# Altium PCB 锐米LoRa终端评估DEMO板_硬件PCB图.PcbDoc
Units mil, origin at the board's own origin, x right, y up, seen from the top; angles counter-clockwise.
Board outline 6000 x 4000 mil, 2 copper layers (Top Layer, Bottom Layer); 48 components, 44 nets, 189 pads, 93 vias.
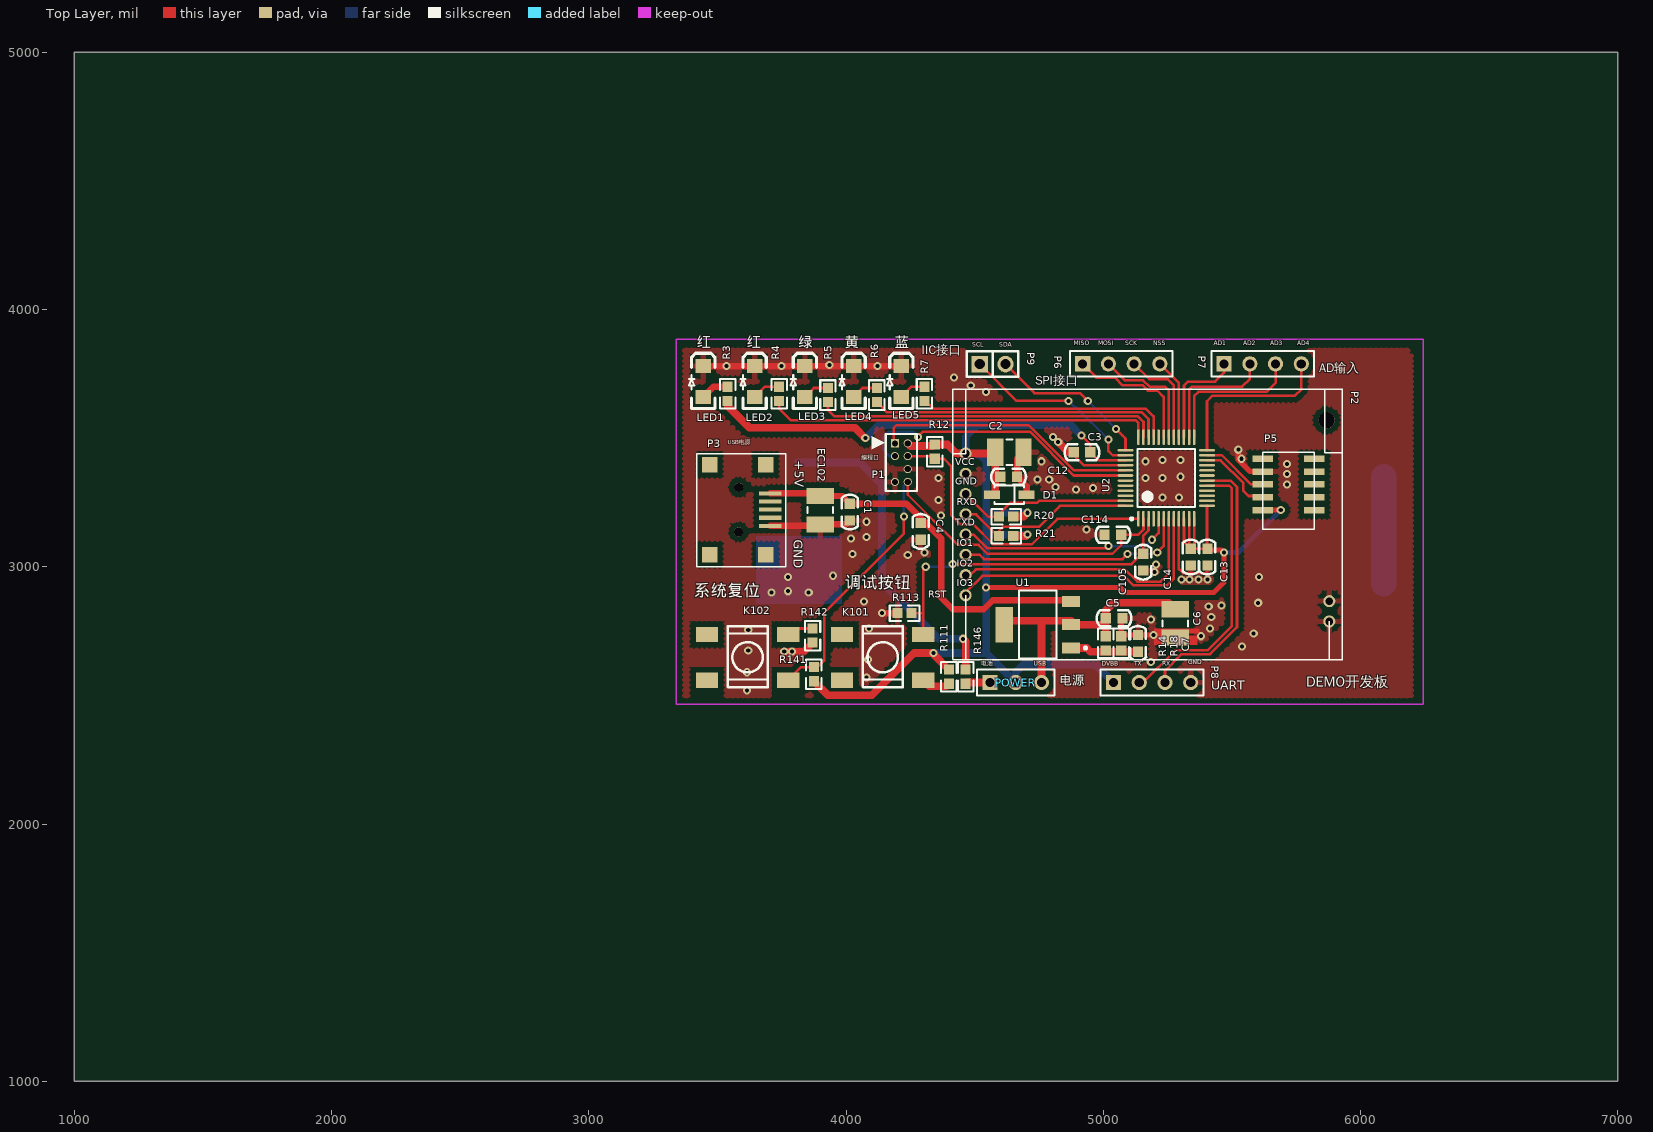
[diagram p0: Top Layer view]
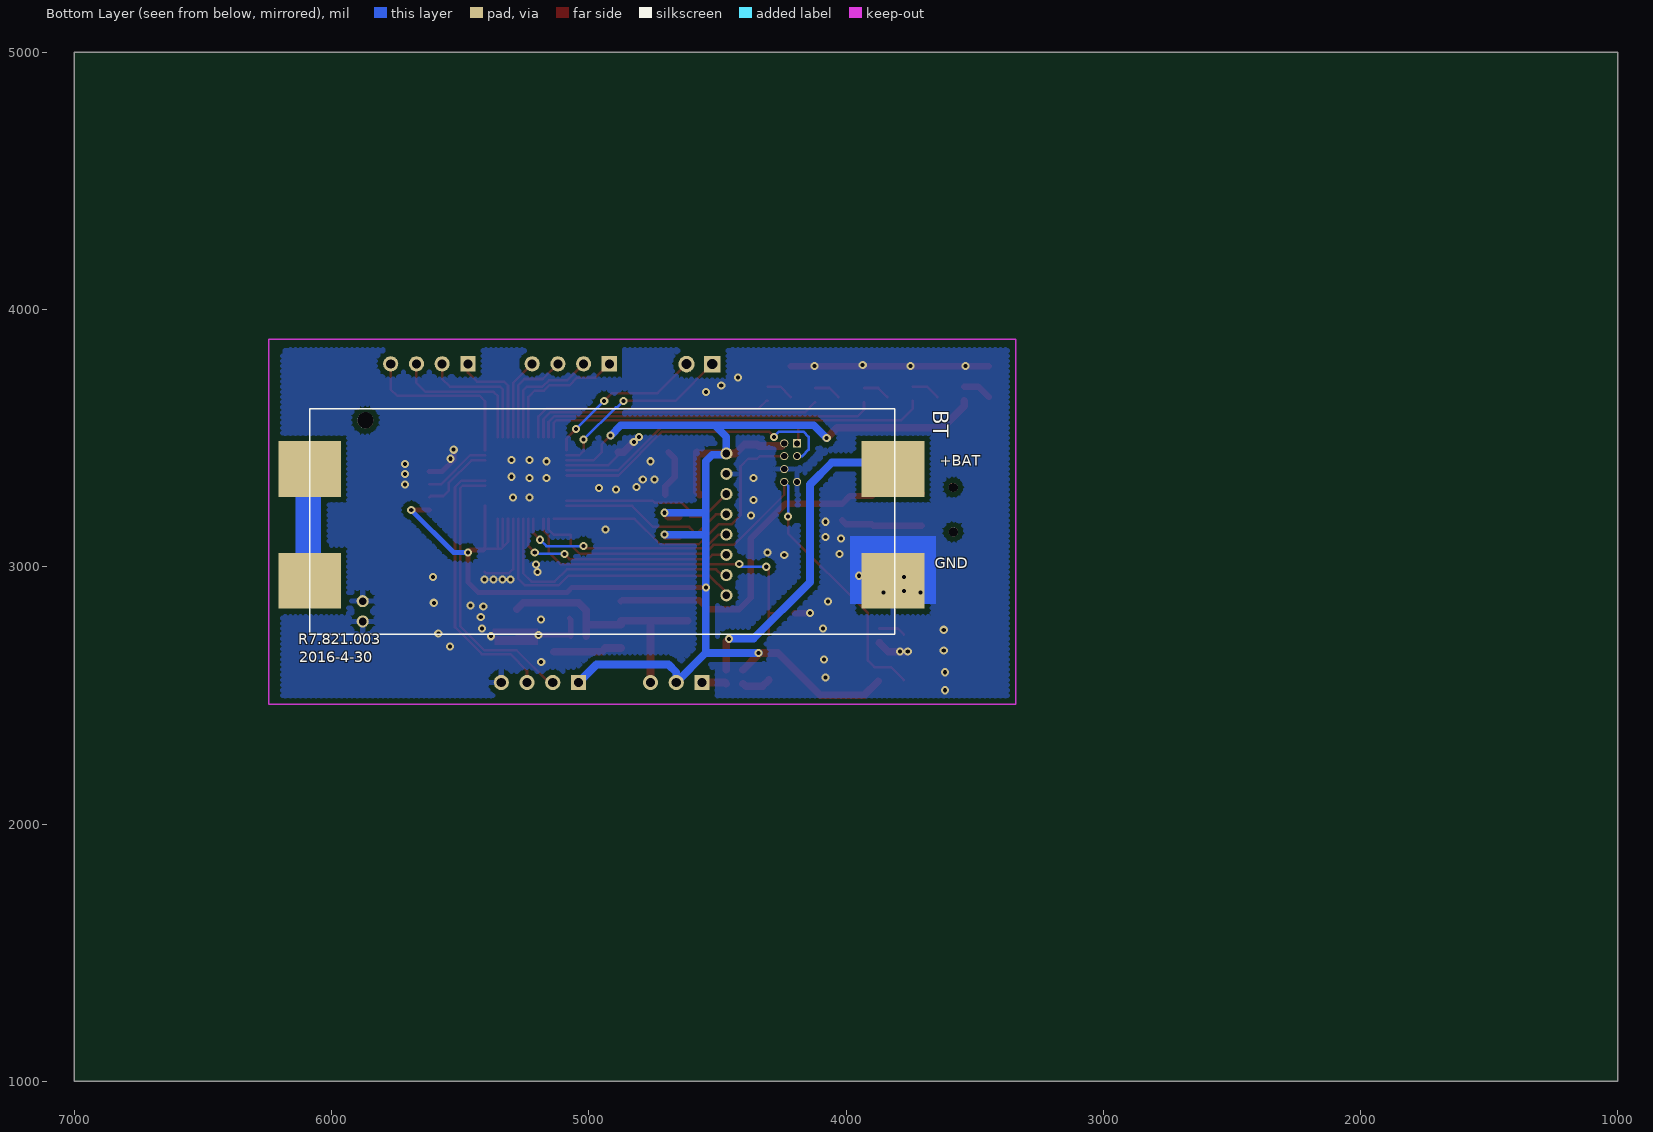
[diagram p1: Bottom Layer view, seen from below]

## Layer stack, top to bottom
Top Layer: signal copper 1.4
Dielectric: dielectric 12.6, FR-4, Dk 4.8
Bottom Layer: signal copper 1.4

## Board outline
1000,1000 7000,1000 7000,5000 1000,5000

## Design rules (kind name [scope] priority, off if disabled: settings)
Clearance Clearance_1 [All vs InPolygon] p1: gap=20
Clearance [All] p2: gap=5
ComponentClearance [All] p1 off: gap=10 collisioncheckmode=3 verticalgap=10 showdistances=FALSE
MinimumSolderMaskSliver [All] p1 off: minsoldermaskwidth=10
PolygonConnect PolygonConnect_1 [All vs ViaDiameter] p1: connectstyle=Direct reliefconductorwidth=10 reliefentries=4 polygonreliefangle="90 Angle"
PolygonConnect [All] p2: connectstyle=Relief reliefconductorwidth=20 reliefentries=4 polygonreliefangle="90 Angle"
RoutingVias [All] p1: holewidth=28 width=50 viastyle="Through Hole" minholewidth=10 minwidth=10 maxholewidth=28 maxwidth=50
SilkToSilkClearance [All] p1 off: silktosilkclearance=10
SilkscreenOverComponentPads [All] p1 off: minsilkscreentomaskgap=10
SolderMaskExpansion [All] p1: expansion=4
Width [All] p1: maxlimit=100 minlimit=10 preferedwidth=10
24 further rules are at their usual default settings.

## Components (designator, comment, footprint, x,y, rotation, side; value= is the part's Value field where it differs from the comment)
BT "Header 4" BT-1 6085,3400 r180 bottom locked
C1 "0.01u" 0603C 4015,3180 r90 top
C2 "Cap Pol1" 3225[1210] 4635,3445 r0 top
C3 "0.01u" 0603C 4950,3445 r180 top
C4 "0.01uF" 0603c 4290,3105 r90 top
C5 "0.01uF" 0603C 5075,2800 r180 top
C6 "22uF" 3225[1210] 5280,2780 r270 top
C7 "1000pF" 0603C 5135,2735 r270 top
C12 "0.01uF" 0603C 4665,3350 r180 top
C13 "0.01u" 0603C 5405,3005 r90 top
C14 "1u" 0603C 5340,3005 r90 top
C105 "0.01u" 0603C 5155,2985 r90 top
C114 "0.01u" 0603C 5005,3125 r0 top
D1 "ESD" SOD123/X.85 4635,3280 r180 top
EC102 "220uF/10V" 3225[1210] 3900,3220 r270 top
K101 "" KEYSMT 3985,2560 r180 top
K102 "" KEYSMT 3460,2560 r180 top
LED1 "HSMS-C280红" LED-SOP 3445,3660 r270 top
LED2 "HSMS-C280红" LED-SOP 3645,3660 r270 top
LED3 "HSMS-C280绿" LED-SOP 3840,3660 r270 top
LED4 "HSMS-C280黄" LED-SOP 4030,3660 r270 top
LED5 "HSMS-C280蓝" LED-SOP 4215,3660 r270 top
P1 "DEBUG" HDR-2X7-F-1.27MM_8 4140,3380 r0 top
P2 "LoRa_Module" LIRDA 4465,3440 r270 top locked
P3 "Header 5" USB-MINI 3705,3285 r270 top
P5 "Header 4" SHT10 5620,3420 r0 top
P6 "Header 4" HDR1X4 4920,3788.94 r0 top
P7 "Header 4" HDR1X4 5470,3788.94 r0 top
P8 "Header 4" HDR1X4 5040,2550 r0 top
P9 "Header 2H" SIP2 4520,3787.87 r0 top
POWER "Header 3H" SIP3 4560,2550 r180 top
R3 "Resistor" 0603R 3540,3645 r90 top
R4 "Resistor" 0603R 3740,3645 r90 top
R5 "Resistor" 0603R 3930,3640 r90 top
R6 "Resistor" 0603R 4120,3640 r90 top
R7 "Resistor" 0603R 4305,3645 r90 top
R12 "10k" 0603R 4345,3420 r90 top
R14 "2.2k" 0603R 5010,2730 r270 top
R18 "3.6k" 0603R 5070,2675 r90 top
R20 "Resistor" 0603R 4650,3195 r180 top
R21 "Resistor" 0603R 4650,3120 r180 top
R111 "22k" 0603R 4400,2600 r270 top
R113 "1M" 0603R 4255,2820 r180 top
R141 "22k" 0603R 3875,2555 r90 top
R142 "1K" 0603R 3870,2705 r90 top
R146 "51" 0603R 4465,2545 r90 top
U1 "LM317MBSTT3" 318E-04 4745,2775 r90 top
U2 "STM8L151C8T6D" LQFP48_L 5245,3345 r90 top

## Footprints (in the part's own frame and the unit in brackets; to place one, negate y for a bottom-side part, rotate by r counter-clockwise, add the part's x,y. Pads: shape width x height; smd on the part's side, far side on the other; paste and mask are expansions set on the pad)
318E-04 [mm] "SOT-223/SC-73; 4 Leads; Body 6.7 x 7.3 mm, inc. leads (LxW max)"
  rect 1.1x1.75 smd: 1(-2.3,-3.3) 2(0,-3.3) 3(2.3,-3.3)
  rect 3.5x1.75 smd: 4(0,3.3)
  silkscreen extent -3.35,-4.85 3.35,1.85
0603C [mil]
  rect 40x40 smd: 1(65.09,-0.09) 2(0.09,-0.09)
  silkscreen extent -35,-31 100,31
0603c [mil]
  rect 40x40 smd: 1(65.09,-0.09) 2(0.09,-0.09)
  silkscreen extent -35,-31 100,31
0603R [mm]
  rect 1x1 smd: 1(0,0) 2(1.397,0)
  silkscreen extent -0.76,-0.76 2.16,0.76
3225[1210] [mm] "Chip Resistor; Body 3.2 x 2.5 mm (LxW typ)"
  rect 1.6x2.7 smd: 1(-1.4,0) 2(1.4,0)
  silkscreen extent -0.3,-1.25 0.3,1.25
BT-1 [mm]
  rect 6.2x5.5 smd: 1(57.6,-0.5) 2(0,-0.5) 3(0,-11.55) 4(57.6,-11.55)
  round 1.6 hole 1.6: ""(5.5,4.3)
  silkscreen extent 0,-16.84 57.78,5.46
HDR1X4 [mm] "Connector; Header; 4 Position"
  rect 1.5x1.5 hole 0.9: 1(0,0)
  round 1.5 hole 0.9: 2(2.54,0) 3(5.08,0) 4(7.62,0)
  silkscreen extent -1.27,-1.27 8.89,1.27
HDR-2X7-F-1.27MM_8 [mm] "Connector; Header; 10x2 Position"
  rect 0.8x0.8 hole 0.6: 1(1.27,2.54)
  round 0.8 hole 0.6: 2(2.54,2.54) 3(1.27,1.27) 4(2.54,1.27) 6(2.54,0) 7(1.27,-1.27) 8(2.54,-1.27)
  silkscreen extent -1.02,-2.17 3.44,3.44
KEYSMT [mil]
  rect 86.61x60 smd: 1(-315.4,0.45) 2(-315.4,-176.72) 3(0.35,0.45) 4(0.35,-176.72)
  silkscreen extent -236,-208 -81,28
LED-SOP [mil]
  rect 55x60 smd: 1(0,0) 2(-120,0)
  silkscreen extent -170,-55 45,45
LIRDA [mm]
  round 1.2 hole 0.762: 1(0,0) 2(2,0) 3(4,0) 4(6,0) 5(8,0) 6(10,0) 7(12,0) 8(14,0) 9(16.57,35.91) 10(14.57,35.91)
  silkscreen extent -6.35,-1.27 20.35,37.23
LQFP48_L [mm] "Thin QFP, 48-Leads, Body 7x7mm, Pitch 0.5mm, IPC High Density"
  oval 1.55x0.25 smd: 1(-4.025,2.75) 2(-4.025,2.25) 3(-4.025,1.75) 4(-4.025,1.25) 5(-4.025,0.75) 6(-4.025,0.25) 7(-4.025,-0.25) 8(-4.025,-0.75) 9(-4.025,-1.25) 10(-4.025,-1.75) 11(-4.025,-2.25) 12(-4.025,-2.75) 25(4.025,-2.75) 26(4.025,-2.25) 27(4.025,-1.75) 28(4.025,-1.25) 29(4.025,-0.75) 30(4.025,-0.25) 31(4.025,0.25) 32(4.025,0.75) 33(4.025,1.25) 34(4.025,1.75) 35(4.025,2.25) 36(4.025,2.75)
  oval 0.25x1.55 smd: 13(-2.75,-4.025) 14(-2.25,-4.025) 15(-1.75,-4.025) 16(-1.25,-4.025) 17(-0.75,-4.025) 18(-0.25,-4.025) 19(0.25,-4.025) 20(0.75,-4.025) 21(1.25,-4.025) 22(1.75,-4.025) 23(2.25,-4.025) 24(2.75,-4.025) 37(2.75,4.025) 38(2.25,4.025) 39(1.75,4.025) 40(1.25,4.025) 41(0.75,4.025) 42(0.25,4.025) 43(-0.25,4.025) 44(-0.75,4.025) 45(-1.25,4.025) 46(-1.75,4.025) 47(-2.25,4.025) 48(-2.75,4.025)
  silkscreen extent -4.15,-2.85 2.85,3.55, body extent -3.5,-3.5 3.5,3.5, height 1.6
SHT10 [mm]
  rect 2x0.65 smd: 0(0,0) 1(0,-1.27) 2(0,-2.54) 3(0,-3.81) 4(0,-5.08) 5(5.08,-5.08) 6(5.08,-3.81) 7(5.08,-2.54) 8(5.08,-1.27) 9(5.08,0)
  round 0.7 on Top Overlay: 1(-0.508,0.889)
  silkscreen extent 0,-6.97 5.1,0.64
SIP2 [mil]
  rect 64x64 hole 40: 1(0,0)
  round 64 hole 40: 2(100,0)
  silkscreen extent -50,-50 150,50
SIP3 [mm]
  rect 1.5x1.5 hole 0.9: 1(0,0)
  round 1.5 hole 0.9: 2(-2.54,0) 3(-5.08,0)
  silkscreen extent -6.35,-1.27 1.27,1.27
SOD123/X.85 [mm] "SOD-123; 2 Leads; Body 2.7 x 1.6 mm, (LxW)"
  rect 1.6x0.85 smd: 1(-1.7,0) 2(1.7,0)
  silkscreen extent -1.45,-0.9 1.45,0.9
USB-MINI [mm]
  round 0.9 hole 0.9: 0(-0.6,-3.1) 0(3.8,-3.1)
  rect 0.4x2.2 smd: 1(0,0) 2(0.8,0) 3(1.6,0) 4(2.4,0) 5(3.2,0)
  rect 1.524x1.524 smd: ""(-2.85,-0.45) ""(-2.85,-5.95) ""(6.05,-0.45) ""(6.05,-5.95)
  silkscreen extent -3.94,-7.24 7.24,1.52

## Part data
BT P5: "Header, 4-P"
C1: library part CAP, "Capacitor"
C2: "Polarized Capacitor (Radial)"
C3 C13 C14: library part "0603_50V_15pF±5% NPO", "电容"
C4 C5 C6 C7 C12 C105 C114: library part ProE.tmp_22p_13
D1: library part Diode, "Default Diode"
EC102: library part "Cap Pol1", "Polarized Capacitor (Radial)"
K101 K102: library part SW-
LED1 LED2 LED3 LED4 LED5: library part HSMS-C280, "Miniature Chip LED, R"
P1: library part "Header 4X2", "Header, 4-Pin, Dual row"
P2: library part "Header 10", "Header, 10-Pin"
P3: "Header, 5-P"
P6 P7 P8: "Header, 4-Pin"
P9: "Header, 2-Pin, Right Ang"
POWER: "Header, 3-Pin, Right Ang"
R3 R4 R5 R6 R7 R20 R21: "Resistor SMD - IEC symbol versi"
R12: library part RES
R14 R18: library part 0603_20kΩ±1%100pp
R111 R113 R141 R142 R146: library part ProE.tmp_10k_
U1: "Three-Terminal Adjustable Output Positive Voltage Regulator"
U2: library part Component_1

## Via types
v1: diameter 31.5, hole 15.75, Top Layer to Bottom Layer, tented both sides, 93 vias

## Nets (pads, with @x,y where several pads share a name; then routed paths per layer and width w, separated by ;. In a path a pad name is that pad's centre, name@x,y a point inside that pad or via, vN(x,y) a via of type N, cw(c..) or ccw(c..) an arc to the next point about the centre after c; other vN are vias at no path point)
+3.3V: C5.1 C6.1 POWER.3 R14.1 U1.2 U1.4 | length 1029.7
  Top Layer w30: U1.4@4615.08,2790 4755,2790 ; POWER.3 4760,2785 4755,2790 ; U1.2 5009.91,2775 ; U1.2@4874.92,2790 4755,2790 ; R14.1 5009.91,2730.09 5009.91,2775 ; C6.1 5255.12,2860 5040,2860 5009.91,2829.91 C5.1 5009.91,2775
AD1: P7.1 U2.27 | length 411.6
  Top Layer w10: U2.27 5313.9,3703.9 5330,3720 5435,3720 5470,3755 P7.1
AD2: P7.2 U2.26 | length 497.6
  Top Layer w10: U2.26 5333.58,3688.58 5345,3700 5540,3700 5570,3730 P7.2
AD3: P7.3 U2.25 | length 571.9
  Top Layer w10: U2.25 5353.27,3663.27 5370,3680 5635,3680 5670,3715 P7.3
AD4: P7.4 U2.24 | length 674.9
  Top Layer w10: U2.24 5403.46,3643.46 5425,3665 5745,3665 5770,3690 P7.4
DATA: P5.2 U2.23 | length 263.6
  Top Layer w10: U2.23 5461.42,3433.58 5575,3320 P5.2
DISPLAY: C105.1 K101.2 R113.1 U2.3 | length 1325.7
  Top Layer w10: R113.1 4300.4,2820 ; K101.2 4300.4,2820 ; v1(4310,3000) 4300.4,2990.4 4300.4,2820 ; v1(4415,3010) 5110,3010 C105.1@5155,3055 ; C105.1 5155,3050.18 C105.1@5155,3055 ; U2.3 5176.1,3141.1 5155,3120 C105.1@5155,3055
  Bottom Layer w10: v1(4310,3000) 4405,3000 v1(4415,3010)
DVBB: C2.1 C3.2 C12.1 C13.1 C14.1 D1.2 P1.2 P2.1 P5.4 P8.1 POWER.2 R3.1 R12.2 R20.1 R21.1 R111.1 R141.1 U2.10 U2.11 U2.12 U2.13 U2.39 | length 7205.9
  Top Layer w10: v1(4915,3510) 4949.91,3475.09 C3.2 4981.1,3413.9 U2.39 ; U2.10 5313.9,3096.28 C14.1@5333.58,3076.59 ; U2.11 C14.1@5333.58,3076.59 ; U2.12 C14.1@5353.27,3070.09 ; U2.13 5403.46,3071.71 C13.1 C14.1@5353.27,3070.09 ; C14.1@5333.58,3076.59 C14.1 C14.1@5353.27,3070.09
  Top Layer w20: v1(4545,2920) 5065,2920 5085,2900 5430,2900 5470,2940 v1(5470,3055) 5460,3065 5410.18,3065 C13.1 ; P5.4 v1(5690,3220)
  Top Layer w30: R3.1 3540,3625 3625,3540 4035,3540 v1(4075,3500) ; R141.1 3930,2500 4100,2500 4265,2665 v1(4340,2665) 4340,2660 R111.1 ; P1.2 4250.75,3469.25 4339.25,3469.25 R12.2 4395,3475 4430,3440 P2.1 4574.88,3440 C2.1 4579.88,3291.81 D1.2 ; R21.1 4700,3120 v1(4705,3125) ; R20.1 4690,3195 v1(4705,3210)
  Bottom Layer w20: v1(5470,3055) 5525,3055 v1(5690,3220)
  Bottom Layer w30: v1(4075,3500) 4125,3550 4510,3550 ; v1(4340,2665) 4545,2665 ; v1(4705,3125) 4545,3125 ; v1(4705,3210) 4545,3210 ; v1(4915,3510) 4875,3550 4510,3550 ; P8.1 4970,2620 4690,2620 4660,2590 POWER.2 4545,2665 ; 4510,3550 4465,3505 P2.1 4470,3435 4520,3435 4545,3410 4545,3210 ; 4545,2665 v1(4545,2920) 4545,3125 ; 4545,3125 4545,3210
DVCC: C1.1 C4.1 EC102.1 P3.1 U1.3 | length 1507.4
  Top Layer w25: P3.1 3890.12,3285 EC102.1 3985.06,3275.12 C1.1 4234.91,3245.09 4370,3110 4370,2880 4415,2835 4535,2835 4570,2870 4870.47,2870 U1.3
GND: BT.4 C1.2 C2.2 C3.1 C4.2 C5.2 C6.2 C7.2 C12.2 C13.2 C14.2 C105.2 C114.2 D1.1 EC102.2 LED1.2 LED2.2 LED3.2 LED4.2 LED5.2 P1.6 P1.7 P2.2 P2.9 P2.10 P3.5 P5.1@5620,3370 P8.4 R18.2 R113.2 R142.1 U2.9 U2.40 | length 2526.3
  Top Layer w10: C3.1 4884.91,3435.09 4925.79,3394.21 U2.40 ; U2.9 5294.21,2990.79 5310,2975 5400,2975 5405.09,2980.09
  Top Layer w20: C5.2 5070,2795.18 R18.2 5074.91,2734.91 C7.2 5269.97,2734.91 C6.2 ; v1(5525,3455) 5525,3415 5570,3370 P5.1@5620,3370
  Top Layer w25: LED1.2 v1(3535,3780) LED2.2 v1(3750,3780) LED3.2 LED4.2 v1(4122.5,3780) LED5.2 ; P3.5 3894.13,3159.02 EC102.2 3999.88,3164.88 C1.2 ; v1(4140,2820) R113.2 ; C2.2 4664.91,3419.79 C12.2 4701.93,3313.07 D1.1
  Top Layer w30: v1(3760,2670) v1(3790,2670) 3835,2670 R142.1 ; v1(4825,3485) 4864.91,3445.09 C3.1
  other v1: 3615,2520 4080,2570 3615,2590 5184.91,2629.41 4085,2640 3620,2675 5540,2690 5380,2730 5195,2735 5585,2740 3620,2755 4090,2760 5415,2760 5185,2795 5420,2805 5410,2845 5460,2850 5602.5,2860 4070,2865 3710,2900 3855,2900 3775,2905 5305,2950 5335,2950 5370,2950 5405,2950 3775,2960 5605,2960 3950,2965 5200,2980 5205.09,3009.52 4240,3045 4025,3050 4305,3055 4020,3110 4080,3115 4935,3145 4080,3175 4369.5,3200 4360,3260 5230,3270 5295,3270 4894.85,3300 4960,3305.63 4815,3310 5715,3320 4745,3340 4790,3340 4360,3345 5165,3345 5230,3345 5300,3350 5715,3360 5715,3400 4760,3410 5165,3410 5230,3415 5300,3415 5537.56,3420 4805,3505 4545,3680 4485,3705 4420,3735 3935,3785
LED2: R4.1 U2.36 | length 1505
  Top Layer w10: R4.1 3740,3615 3785,3570 5125,3570 5136.73,3558.27 U2.36
LED3: R5.1 U2.35 | length 1335.8
  Top Layer w10: R5.1 3930,3610 3955,3585 5135,3585 5156.42,3563.58 U2.35
LED4: R6.1 U2.34 | length 1153.9
  Top Layer w10: R6.1 4160,3600 5150,3600 5176.1,3573.9 U2.34
LED5: R7.1 U2.33 | length 996.7
  Top Layer w10: R7.1 4310,3645 4340,3615 5165,3615 5195.79,3584.21 U2.33
NetBT_1: BT.1 R146.2 | length 1273.2
  Top Layer w30: v1(4455,2720) 4465,2710 R146.2
  Bottom Layer w30: BT.1@3812.28,3405 4055,3405 4140,3320 4140,2940 4360,2720 v1(4455,2720)
NetBT_2: BT.2 BT.3 | length 415.4
  Bottom Layer w100: BT.3@6090,2935 BT.2@6090,3350.35
NetC7_1: C7.1 R14.2 R18.1 U1.1 | length 266
  Top Layer w30: U1.1 4935.55,2684.45 4950,2670 5134.82,2670 C7.1
NetK101_1: K101.1 R111.2 | length 113.9
  Top Layer w30: K101.1 4324.95,2535 4390,2535 R111.2
NetK102_2: K102.2 R142.2 | length 104.2
  Top Layer w10: K102.2 3798.68,2760 R142.2
NetLED1_1: LED1.1 R3.2 | length 111.6
  Top Layer w25: LED1.1 3485,3700 R3.2
NetLED2_1: LED2.1 R4.2 | length 111.6
  Top Layer w10: LED2.1 3685,3700 R4.2
NetLED3_1: LED3.1 R5.2 | length 104.5
  Top Layer w10: LED3.1 3875,3695 R5.2
NetLED4_1: LED4.1 R6.2 | length 104.5
  Top Layer w10: LED4.1 4065,3695 R6.2
NetLED5_1: LED5.1 R7.2 | length 106.6
  Top Layer w10: LED5.1 4255,3700 R7.2
NetPOWER_1: POWER.1 R146.1 | length 97.1
  Top Layer w30: R146.1 4470,2550 POWER.1
RST: C114.1 K102.1 P1.8 R141.2 U2.2 | length 2166.4
  Top Layer w10: K102.1 3825.85,2610 R141.2 3890,2610 3915,2635 3915,2820 4225,3130 v1(4225,3195) ; P1.8 4240,3280 4435,3085 4515,3085 4550,3050 5035,3050 5070.09,3085.09 C114.1 5136.33,3124.91 5156.42,3145 U2.2
  Bottom Layer w10: v1(4225,3195) 4225,3315 P1.8
SCK: P5.3 U2.22 | length 293.7
  Top Layer w10: U2.22 5456.1,3413.9 5545,3325 5545,3295 5565,3275 5615,3275 P5.3
SCL: P9.1 U2.38 | length 739.6
  Top Layer w10: P9.1 4662.87,3645 v1(4865,3645) ; v1(5020,3495) 5020,3450 5036.42,3433.58 U2.38
  Bottom Layer w10: v1(4865,3645) 4890,3620 4895,3620 v1(5020,3495)
SDA: P9.2 U2.37 | length 631.6
  Top Layer w10: P9.2 4732.87,3675 4910,3675 v1(4940,3645) ; v1(5050,3535) 5086.54,3498.46 U2.37
  Bottom Layer w10: v1(4940,3645) v1(5050,3535)
SOCKET_CON1: P2.5 U2.5 | length 852.3
  Top Layer w10: P2.5 4496.17,3125.04 4548.71,3072.5 5012.5,3072.5 v1(5020,3080) ; v1(5190,3105) 5215.47,3130.47 U2.5
  Bottom Layer w10: v1(5020,3080) 5165,3080 v1(5190,3105)
SOCKET_CON2: P2.6 U2.6 | length 904.1
  Top Layer w10: P2.6 4520,3046.3 4536.3,3030 5075,3030 v1(5095,3050) ; v1(5210,3055) 5235.16,3080.16 U2.6
  Bottom Layer w10: v1(5095,3050) 5205,3050 v1(5210,3055)
SOCKET_CON3: P2.7 U2.7 | length 1043.9
  Top Layer w10: P2.7 4482.56,2967.56 4505,2990 5085,2990 5132.5,2942.5 5222.5,2942.5 5254.84,2974.84 U2.7
SOCKET_RESET: P2.8 U2.8 | length 1106.4
  Top Layer w10: P2.8 4465,2900 4530,2965 5080,2965 5117.5,2927.5 5247.5,2927.5 5274.53,2954.53 U2.8
SOCKET_RXD: P2.3 R20.2 U2.47 | length 694.9
  Top Layer w10: P2.3 4552.52,3195 4605,3195 4605,3215 4638.27,3248.27 4742.57,3248.27 4750.72,3256.42 U2.47
SOCKET_TXD: P2.4 R21.2 U2.48 | length 712.2
  Top Layer w10: P2.4 4506.22,3203.78 4580,3130 R21.2@4595,3130 ; R21.2 R21.2@4595,3130 ; U2.48 4831.73,3236.73 4750,3155 4610,3155 4595,3140 R21.2@4595,3130
SPI2_MISO: P6.1 U2.31 | length 525
  Top Layer w10: P6.1 4973.94,3735 5045,3735 5075,3705 5153.79,3705 5173.79,3685 5210,3685 5235.16,3659.84 U2.31
SPI2_MOSI: P6.2 U2.30 | length 459.5
  Top Layer w10: P6.2 5083.94,3725 5155,3725 5180,3700 5240,3700 5254.84,3685.16 U2.30
SPI2_NSS: P6.4 U2.28 | length 317.3
  Top Layer w10: P6.4@5218.94,3788.94 P6.4 5294.21,3714.72 U2.28
SPI2_SCK: P6.3 U2.29 | length 391.1
  Top Layer w10: P6.3 5178.94,3730 5250,3730 5274.53,3705.47 U2.29
SWIM: P1.4 R12.1 U2.1 | length 1190.9
  Top Layer w10: P1.4 4335,3430 R12.1 4380,3420 4410,3390 4410,3200 4445,3165 4495,3165 4572.5,3087.5 4722.5,3087.5 4821.54,3186.54 U2.1
UART1_RX: P1.1 U2.41 | length 1040.4
  Top Layer w10: P1.1 4185,3485 4185,3540 4195,3550 4711.21,3550 4886.69,3374.53 U2.41
UART1_TX: P1.3 U2.42 | length 1143.7
  Top Layer w10: v1(4280,3505) 4279.25,3505.75 4298.5,3525 4715,3525 4885.16,3354.84 U2.42
  Bottom Layer w10: P1.3 4170,3430 4145,3455 4145,3505 4165,3525 4260,3525 v1(4280,3505)
XBEE_UART_RX: P8.3 U2.18 | length 1067.4
  Top Layer w10: P8.3 5240,2595 5305,2660 5415,2660 5520,2765 5520,3310 5494.84,3335.16 5464.84,3335.16 U2.18
XBEE_UART_TX: P8.2 U2.17 | length 1087
  Top Layer w10: P8.2 5155,2550 5280,2675 5405,2675 5500,2770 5500,3305 5490,3315 5403.94,3315 U2.17
pads on no net: BT. K101.3 K101.4 K102.3 K102.4 P3. P3.0 P3.2 P3.3 P3.4 P5.0 P5.1@5600,3455 P5.5 P5.6 P5.7 P5.8 P5.9 U2.4 U2.14 U2.15 U2.16 U2.19 U2.20 U2.21 U2.32 U2.43 U2.44 U2.45 U2.46

## Polygon pours and split planes (outlines as drawn)
GND on Top Layer "Bottom Layer-No Net" (hatched 90Degree grid 20 track 20, remove dead copper, pour order 2): 3327.6,3832.5 3327.6,2497.5 3352.6,2472.5 3417.6,2472.5 6177.6,2472.5 6197.6,2492.5 6197.6,3827.5 6182.6,3842.5 3337.6,3842.5 3327.6,3832.5
GND on Bottom Layer "Bottom Layer-No Net" (hatched 90Degree grid 20 track 20, remove dead copper, pour order 4): 3319.63,3835 3319.63,2500 3344.63,2475 3409.63,2475 6169.63,2475 6189.63,2495 6189.63,3830 6174.63,3845 3329.63,3845 3319.63,3835

## Keep-outs
Keep-Out Layer:
  lines w5: 3340,2465 6245,2465 6245,3885 3340,3885 3340,3860 3340,2465

## Other copper
Top Layer:
  rectangle net GND: 5196.85,2695 5366.85,2730
  rectangle net GND: 5196.85,2740 5375,2760
Bottom Layer:
  rectangle net GND: 3650,2855 3985,3120

## Silkscreen, mask and mechanical layers (free items; w line width, h text height)
Top Overlay:
  text "MISO" at 4885,3855 h30
  text "MOSI" at 4980,3855 h30
  text "SCK" at 5085,3855 h30
  text "NSS" at 5195,3855 h30
  text "AD1" at 5430,3855 h30
  text "AD2" at 5545,3855 h30
  text "AD3" at 5650,3855 h30
  text "AD4" at 5755,3855 h30
  text "SCL" at 4490,3850 h30
  text "SDA" at 4595,3850 h30
  text "红" at 3420,3840 h70
  text "红" at 3615,3840 h70
  text "绿" at 3815,3840 h70
  text "黄" at 3995,3840 h70
  text "蓝" at 4190,3840 h70
  text "IIC接口" at 4295,3815 h60
  text "AD输入" at 5840,3745 h60
  text "SPI接口" at 4735,3695 h60
  text "USB电源" at 3540,3470 h30
  text "+5V" at 3790,3415 h60 r270
  text "编程口" at 4060,3410 h30
  text "GND" at 3785,3105 h60 r270
  text "调试按钮" at 3995,2900 h80
  text "系统复位" at 3410,2870 h80
  text "GND" at 5330,2615 h30
  text "电池" at 4525,2610 h30
  text "USB" at 4730,2610 h30
  text "DVBB" at 4995,2610 h30
  text "TX" at 5120,2610 h30
  text "RX" at 5230,2610 h30
  text "电源" at 4830,2530 h60
  text "DEMO开发板" at 5790,2520 h70
  text "UART" at 5420,2510 h60
Bottom Overlay:
  text "+BAT" at 3635,3380 h70
  text "GND" at 3655,2980 h70
  text "R7.821.003" at 6130,2685 h70
  text "2016-4-30" at 6125,2615 h70
Mechanical 1:
  lines w5: 3355,2505 3355,3840 3365,3850 6210,3850 6225,3835 6225,2495 6210,2480 3380,2480 3355,2505

## Text inside footprints (layer, text, board x,y; h text height)
P2: Top Overlay "VCC" at 4425,3385 h45; Top Overlay "GND" at 4425,3310 h45; Top Overlay "RXD" at 4430,3230 h45; Top Overlay "TXD" at 4425,3150 h45; Top Overlay "IO1" at 4430,3070 h45; Top Overlay "IO2" at 4430,2990 h45; Top Overlay "IO3" at 4430,2915 h45; Top Overlay "RST" at 4320,2870 h45